# Altium PCB Do_An_2_MCU.PcbDoc
Units mm, origin at the board's own origin, x right, y up, seen from the top; angles counter-clockwise.
Board outline 55.37 x 82.04 mm, 2 copper layers (Top Layer, Bottom Layer); 76 components, 53 nets, 288 pads, 86 vias.
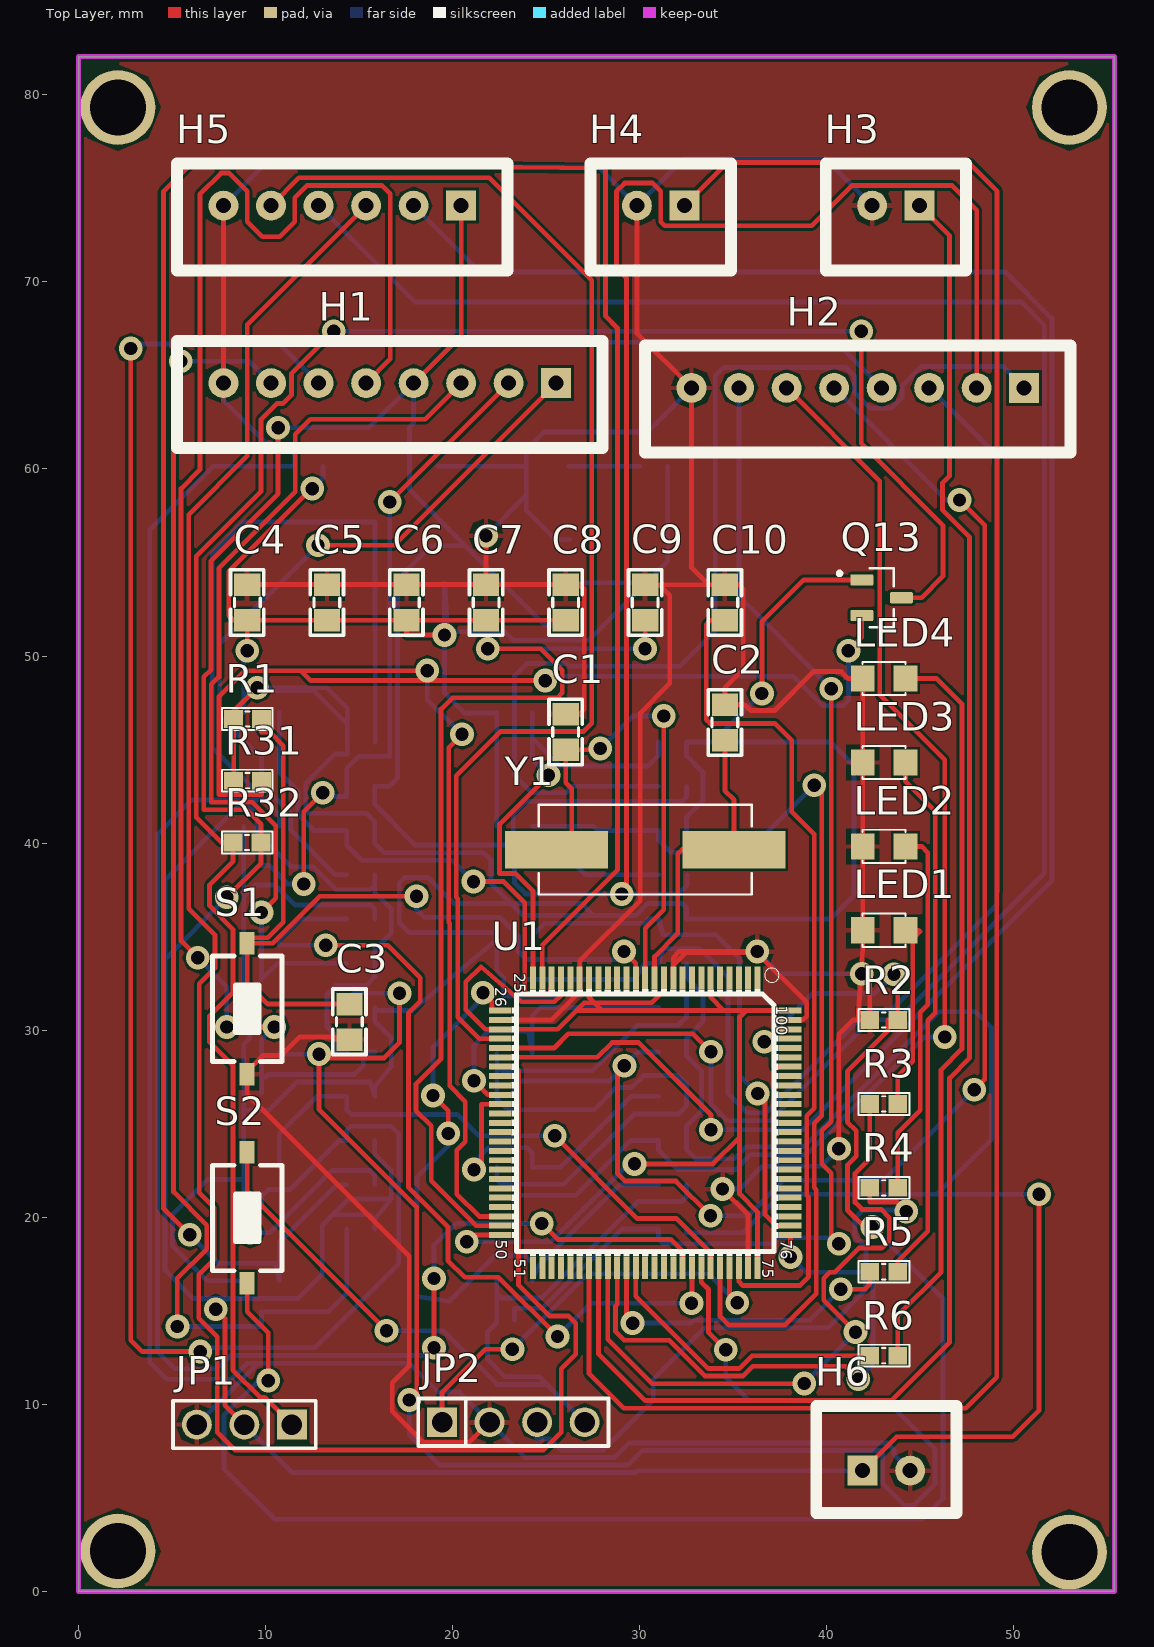
[diagram p0: Top Layer view]
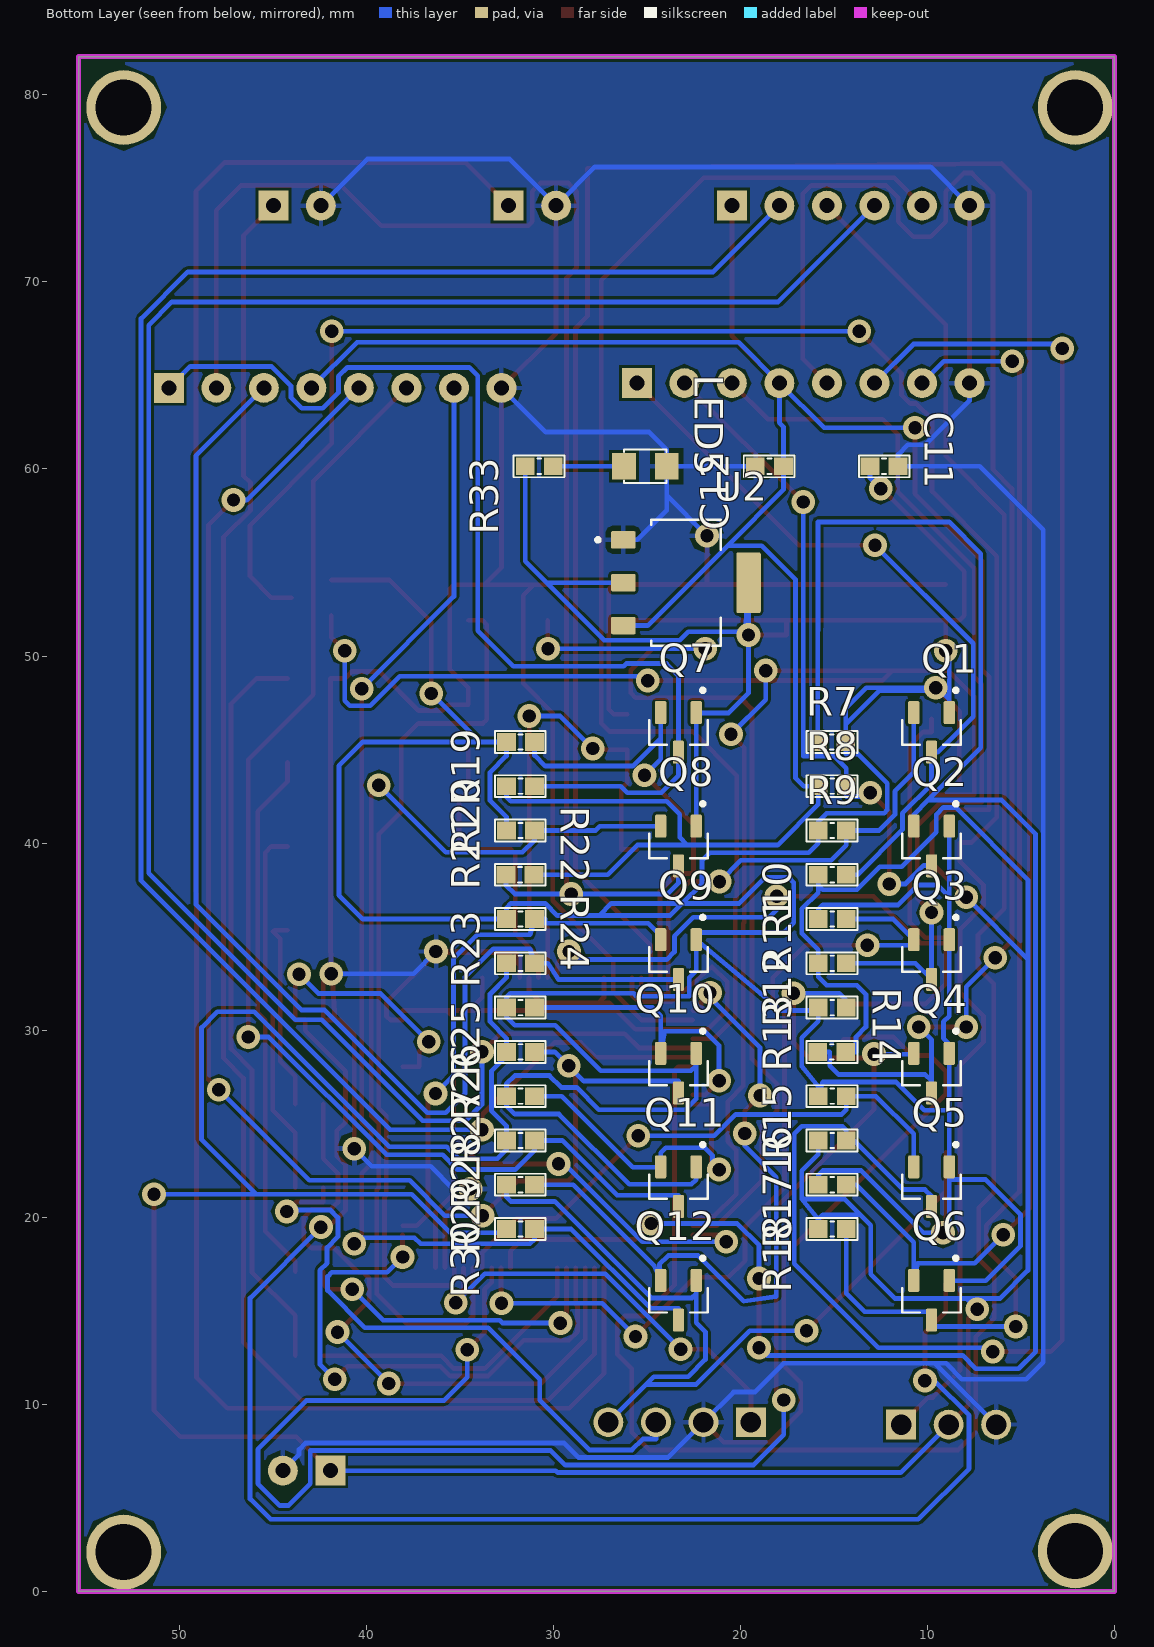
[diagram p1: Bottom Layer view, seen from below]
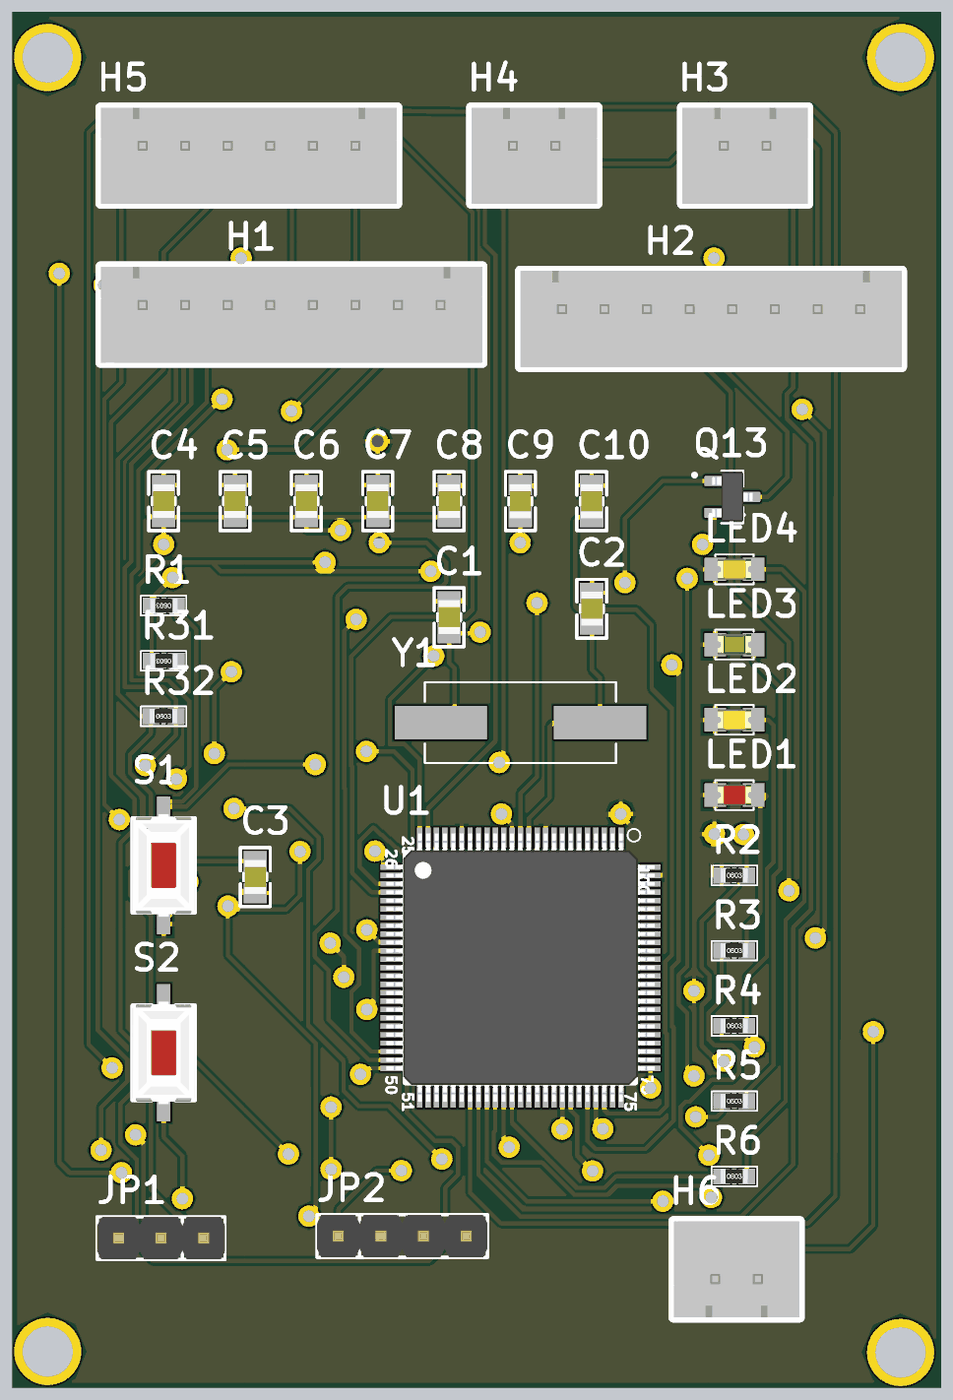
[diagram p2: 3D render of the assembled board from above, using the file's embedded part models]
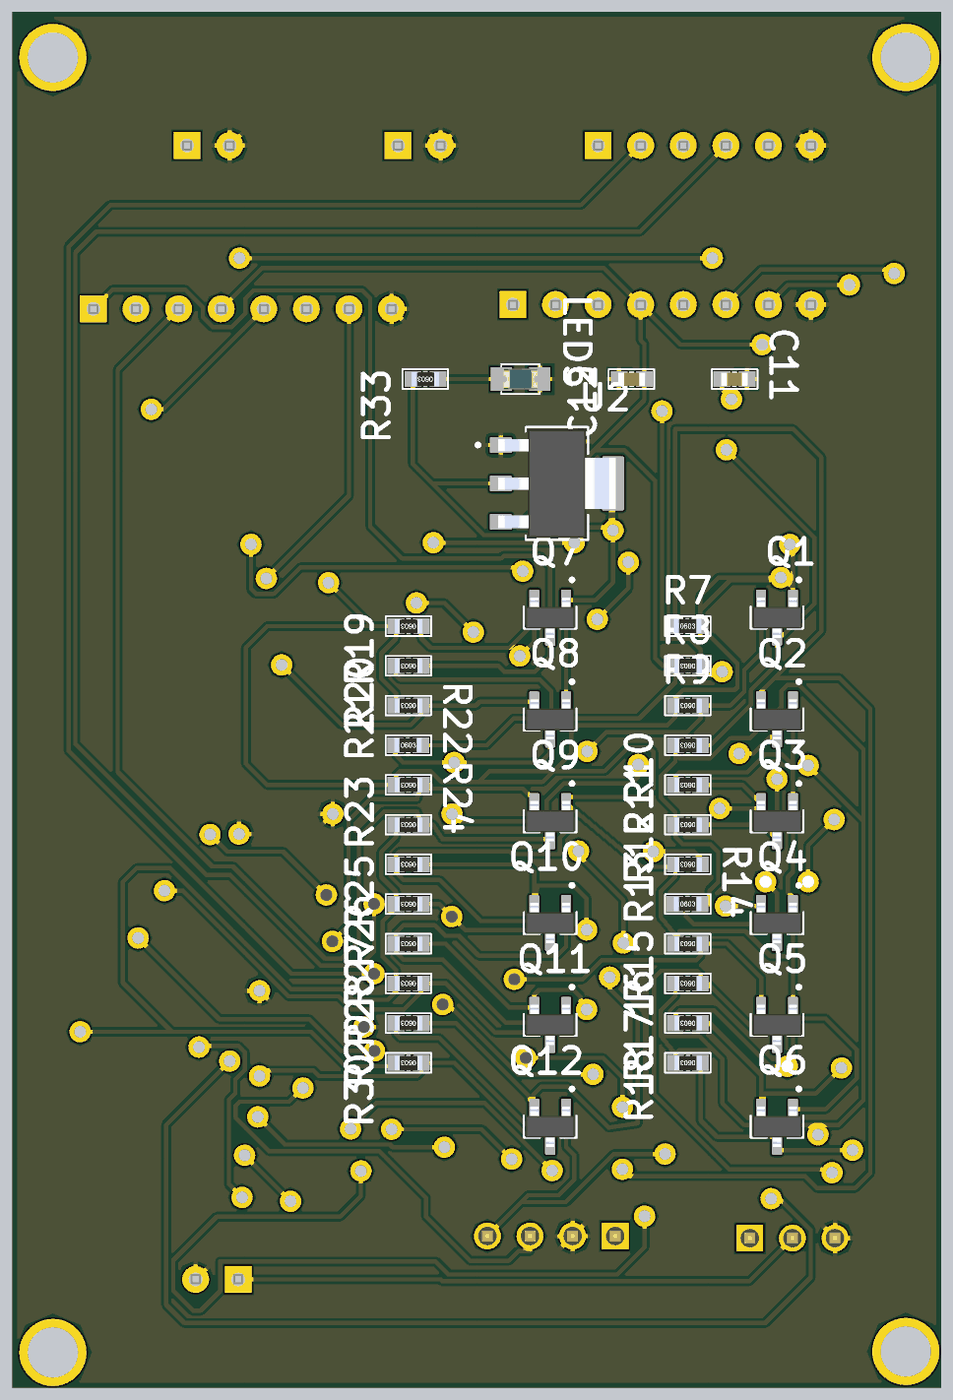
[diagram p3: 3D render of the assembled board from below, using the file's embedded part models]

## Layer stack, top to bottom
Top Solder: solder mask 0.0102, Solder Resist, Dk 3.5
Top Layer: signal copper 0.0356
Dielectric 1: dielectric 0.32, FR-4, Dk 4.8
Bottom Layer: signal copper 0.0356
Bottom Solder: solder mask 0.0102, Solder Resist, Dk 3.5

## Board outline
0,0 55.372,0 55.372,82.042 0,82.042

## Design rules (kind name [scope] priority, off if disabled: settings)
Clearance [All] p1: gap=0.15 ignorepadtopadclearanceinfootprint=FALSE
PolygonConnect [All] p1: connectstyle=Relief reliefconductorwidth=0.254 reliefentries=4 polygonreliefangle="90 Angle" airgapwidth=0.254
RoutingVias [All] p1: holewidth=0.711 width=1.27 viastyle="Through Hole" minholewidth=0.711 minwidth=1.27 maxholewidth=0.711 maxwidth=1.27
SolderMaskExpansion [All] p1: expansion=0.102 istentingtop=FALSE
Width [All] p1: maxlimit=0.254 minlimit=0.254 preferedwidth=0.254
30 further rules are at their usual default settings.

## Classes and differential pairs
component class MCU_Do_An_2: 16 C1 C2 C3 C4 C5 C6 C7 C8 C9 C10 C11 C12 H1 H2 H3 H4 H5 H6 JP1 JP2 LED1 LED2 LED3 LED4 LED5 Q2 Q3 Q4 Q5 Q6 Q7 Q8 Q10 Q11 Q12 Q13 R1 R2 R3 R4 R5 R6 R7 R8 R9 R10 R11 R12 R13 R14 R15 R17 R18 R19 R20 R21 R22 R26 R27 R28 R29 R30 R31 R32 R33 S1 S2 U1 U2 Y1

## Components (designator, comment, footprint, x,y, rotation, side; value= is the part's Value field where it differs from the comment)
16 "10k" "tro smd 0603" 15.088,24.107 r0 bottom
C1 "20pF" "tu 0805" 26.035,45.938 r90 top
C2 "20pF" "tu 0805" 34.544,46.446 r90 top
C3 "20pF" "tu 0805" 14.481,30.453 r270 top
C4 "0.1uF" "tu 0805" 9.017,52.861 r90 top
C5 "0.1uF" "tu 0805" 13.271,52.861 r90 top
C6 "0.1uF" "tu 0805" 17.526,52.861 r90 top
C7 "0.1uF" "tu 0805" 21.78,52.861 r90 top
C8 "0.1uF" "tu 0805" 26.035,52.861 r90 top
C9 "2.2uF" "tu 0805" 30.29,52.861 r270 top
C10 "2.2uF" "tu 0805" 34.544,52.861 r270 top
C11 "106" "tu 0603" 12.319,60.141 r180 bottom
C12 "106" "tu 0603" 18.444,60.141 r0 bottom
H1 "Header 8P 2.54 Duc Thang" XH2.54M-8 25.531,64.586 r180 top
H2 "Header 8P 2.54 Duc" XH2.54M-8 50.546,64.332 r180 top
H3 "Header 2P 2.54 Duc" XH2.54M-2 44.958,74.07 r180 top
H4 "Header 2P 2.54 Duc" XH2.54M-2 32.385,74.07 r180 top
H5 "Header 6P 2.54 Duc Thang" XH2.54M-6 20.451,74.07 r180 top
H6 "Header 2P 2.54 Duc" XH2.54M-2 41.91,6.457 r0 top
JP1 "JP 1x3 2.54" "JP 1x3 DT" 11.405,8.919 r180 top
JP2 "JP 1x4 2.54" "JP 1x4 DT" 19.431,9.046 r0 top
LED1 "LED 0805" LED-0805-Red 44.196,35.338 r180 top
LED2 "LED 0805" LED-0805-Yellow 44.196,39.825 r180 top
LED3 "LED 0805" LED-0805-Green 44.196,44.311 r180 top
LED4 "LED 0805" LED-0805-Orange 44.196,48.797 r180 top
LED5 "LED 0805" LED-0805-Blue 26.221,60.141 r180 bottom
Q1 "BSS138" SOT95P240X111-3N 9.779,45.917 r270 bottom
Q2 "BSS138" SOT95P240X111-3N 9.779,39.846 r270 bottom
Q3 "BSS138" SOT95P240X111-3N 9.779,33.775 r270 bottom
Q4 "BSS138" SOT95P240X111-3N 9.779,27.705 r270 bottom
Q5 "BSS138" SOT95P240X111-3N 9.779,21.634 r270 bottom
Q6 "BSS138" SOT95P240X111-3N 9.779,15.564 r270 bottom
Q7 "BSS138" SOT95P240X111-3N 23.307,45.917 r270 bottom
Q8 "BSS138" SOT95P240X111-3N 23.307,39.846 r270 bottom
Q9 "BSS138" SOT95P240X111-3N 23.307,33.775 r270 bottom
Q10 "BSS138" SOT95P240X111-3N 23.307,27.705 r270 bottom
Q11 "BSS138" SOT95P240X111-3N 23.307,21.634 r270 bottom
Q12 "BSS138" SOT95P240X111-3N 23.307,15.564 r270 bottom
Q13 "BSS138" SOT95P240X111-3N 42.926,53.115 r0 top
R1 "10k" "tro smd 0603" 9.03,46.638 r180 top
R2 "10k" "tro smd 0603" 43.04,30.547 r0 top
R3 "680R" "tro smd 0603" 43.04,26.061 r0 top
R4 "680R" "tro smd 0603" 43.04,21.575 r0 top
R5 "680R" "tro smd 0603" 43.04,17.089 r0 top
R6 "680R" "tro smd 0603" 43.04,12.602 r0 top
R7 "10k" "tro smd 0603" 15.113,45.409 r180 bottom
R8 "10k" "tro smd 0603" 15.088,43.042 r0 bottom
R9 "10k" "tro smd 0603" 15.088,40.675 r0 bottom
R10 "10k" "tro smd 0603" 15.088,38.308 r0 bottom
R11 "10k" "tro smd 0603" 15.088,35.941 r0 bottom
R12 "10k" "tro smd 0603" 15.088,33.575 r0 bottom
R13 "10k" "tro smd 0603" 15.088,31.208 r0 bottom
R14 "10k" "tro smd 0603" 15.113,28.841 r180 bottom
R15 "10k" "tro smd 0603" 15.088,26.474 r0 bottom
R17 "10k" "tro smd 0603" 15.088,21.74 r0 bottom
R18 "10k" "tro smd 0603" 15.088,19.374 r0 bottom
R19 "10k" "tro smd 0603" 31.75,45.409 r0 bottom
R20 "10k" "tro smd 0603" 31.75,43.042 r0 bottom
R21 "10k" "tro smd 0603" 31.75,40.675 r0 bottom
R22 "10k" "tro smd 0603" 31.775,38.308 r180 bottom
R23 "10k" "tro smd 0603" 31.75,35.941 r0 bottom
R24 "10k" "tro smd 0603" 31.75,33.575 r0 bottom
R25 "10k" "tro smd 0603" 31.75,31.208 r0 bottom
R26 "10k" "tro smd 0603" 31.75,28.841 r0 bottom
R27 "10k" "tro smd 0603" 31.75,26.474 r0 bottom
R28 "10k" "tro smd 0603" 31.75,24.107 r0 bottom
R29 "10k" "tro smd 0603" 31.75,21.74 r0 bottom
R30 "10k" "tro smd 0603" 31.75,19.374 r0 bottom
R31 "10k" "tro smd 0603" 9.03,43.336 r180 top
R32 "10k" "tro smd 0603" 9.004,40.034 r0 top
R33 "1k" "tro smd 0603" 30.746,60.141 r0 bottom
S1 "SW-SMD" SW-SMD 9.017,31.144 r90 top
S2 "SW-SMD" SW-SMD 9.017,19.968 r90 top
U1 "MCU-STM32F407VET6(LQFP100)" LQFP100-0.5-13.8X13.8MM 30.29,25.048 r270 top
U2 "AMS1117" SOT229P700X180-4N 22.906,53.918 r180 bottom
Y1 "ECS-80-S-5P-TR" XTAL_ECS-80-S-5P-TR 30.29,39.653 r0 top

## Footprints (in the part's own frame and the unit in brackets; to place one, negate y for a bottom-side part, rotate by r counter-clockwise, add the part's x,y. Pads: shape width x height; smd on the part's side, far side on the other; paste and mask are expansions set on the pad)
"JP 1x3 DT" [mm]
  rect 1.6x1.6 hole 1.1: 1(0,0)
  round 1.6 hole 1.1: 2(2.54,0) 3(5.08,0)
  silkscreen extent -1.27,-1.27 6.35,1.27, body extent -1.27,-1.27 6.35,1.27, height 8.54
"JP 1x4 DT" [mm] "4 pins, 1 row, straight, gold plating"
  rect 1.6x1.6 hole 1.1: 1(0,0)
  round 1.6 hole 1.1: 2(2.54,0) 3(5.08,0) 4(7.62,0)
  silkscreen extent -1.27,-1.27 8.89,1.27, body extent -1.27,-1.27 8.89,1.27, height 8.54
LED-0805-Blue [mil]
  rect 50x55 smd: 1(0,0) 2(90,0)
  silkscreen extent 0,-35 90,35, body extent 5,-25 85,25, height 43
LED-0805-Green [mil]
  rect 50x55 smd: 1(0,0) 2(90,0)
  silkscreen extent 0,-35 90,35, body extent 5,-25 85,25, height 43
LED-0805-Orange [mil]
  rect 50x55 smd: 1(0,0) 2(90,0)
  silkscreen extent 0,-35 90,35, body extent 5,-25 85,25, height 43
LED-0805-Red [mil]
  rect 50x55 smd: 1(0,0) 2(90,0)
  silkscreen extent 0,-35 90,35, body extent 5,-25 85,25, height 43
LED-0805-Yellow [mil]
  rect 50x55 smd: 1(0,0) 2(90,0)
  silkscreen extent 0,-35 90,35, body extent 5,-25 85,25, height 43
LQFP100-0.5-13.8X13.8MM [mm]
  rect 1.2x0.32 smd: 1(-7.75,6) 2(-7.75,5.5) 3(-7.75,5) 4(-7.75,4.5) 5(-7.75,4) 6(-7.75,3.5) 7(-7.75,3) 8(-7.75,2.5) 9(-7.75,2) 10(-7.75,1.5) 11(-7.75,1) 12(-7.75,0.5) 13(-7.75,0) 14(-7.75,-0.5) 15(-7.75,-1) 16(-7.75,-1.5) 17(-7.75,-2) 18(-7.75,-2.5) 19(-7.75,-3) 20(-7.75,-3.5) 21(-7.75,-4) 22(-7.75,-4.5) 23(-7.75,-5) 24(-7.75,-5.5) 25(-7.75,-6) 51(7.75,-6) 52(7.75,-5.5) 53(7.75,-5) 54(7.75,-4.5) 55(7.75,-4) 56(7.75,-3.5) 57(7.75,-3) 58(7.75,-2.5) 59(7.75,-2) 60(7.75,-1.5) 61(7.75,-1) 62(7.75,-0.5) 63(7.75,0) 64(7.75,0.5) 65(7.75,1) 66(7.75,1.5) 67(7.75,2) 68(7.75,2.5) 69(7.75,3) 70(7.75,3.5) 71(7.75,4) 72(7.75,4.5) 73(7.75,5) 74(7.75,5.5) 75(7.75,6)
  rect 0.32x1.2 smd: 26(-6,-7.75) 27(-5.5,-7.75) 28(-5,-7.75) 29(-4.5,-7.75) 30(-4,-7.75) 31(-3.5,-7.75) 32(-3,-7.75) 33(-2.5,-7.75) 34(-2,-7.75) 35(-1.5,-7.75) 36(-1,-7.75) 37(-0.5,-7.75) 38(0,-7.75) 39(0.5,-7.75) 40(1,-7.75) 41(1.5,-7.75) 42(2,-7.75) 43(2.5,-7.75) 44(3,-7.75) 45(3.5,-7.75) 46(4,-7.75) 47(4.5,-7.75) 48(5,-7.75) 49(5.5,-7.75) 50(6,-7.75) 76(6,7.75) 77(5.5,7.75) 78(5,7.75) 79(4.5,7.75) 80(4,7.75) 81(3.5,7.75) 82(3,7.75) 83(2.5,7.75) 84(2,7.75) 85(1.5,7.75) 86(1,7.75) 87(0.5,7.75) 88(0,7.75) 89(-0.5,7.75) 90(-1,7.75) 91(-1.5,7.75) 92(-2,7.75) 93(-2.5,7.75) 94(-3,7.75) 95(-3.5,7.75) 96(-4,7.75) 97(-4.5,7.75) 98(-5,7.75) 99(-5.5,7.75) 100(-6,7.75)
  silkscreen extent -8.27,-7.13 7.11,7.15, body extent -8,-8 8,8, height 1.6
SOT95P240X111-3N [mm]
  rrect25% 1.23x0.6 smd: 1(-1.06,0.95) 2(-1.06,-0.95) 3(1.06,0)
  silkscreen extent -2.35,-1.57 0.65,1.57, body extent -1.2,-1.46 1.2,1.46, height 1.2
SOT229P700X180-4N [mm]
  rrect15% 1.31x0.93 smd: 1(-3.345,2.29) 2(-3.345,0) 3(-3.345,-2.29)
  rrect15% 1.31x3.24 smd: 4(3.345,0)
  silkscreen extent -4.8,-3.36 1.86,3.36, body extent -3.5,-3.25 3.5,3.25, height 1.8
SW-SMD [mm] "Switch SMD type"
  rect 1.2x0.8 smd: 1(-3.5,0) 2(3.5,0)
  silkscreen extent -2.82,-1.85 2.82,1.85, body extent -3.05,-1.85 3.05,1.85, height 2.5
"tro smd 0603" [mm] "Chip Capacitor, 2-Leads, Body 1,60x0,80mm, IPC Medium Density"
  rect 1x0.95 smd mask+0.076: 1(-0.75,0) 2(0.75,0)
  silkscreen extent -1.35,-0.58 1.37,0.58, body extent -0.82,-0.42 0.82,0.43, height 0.44
"tu 0603" [mm] "Chip Capacitor, 2-Leads, Body 1,60x0,80mm, IPC Medium Density"
  rect 1x0.95 smd mask+0.076: 1(-0.75,0) 2(0.75,0)
  silkscreen extent -1.35,-0.58 1.37,0.58, body extent -0.8,-0.4 0.8,0.4, height 0.9
"tu 0805" [mm] "Compoment SMD 80x50mil"
  rect 1.2x1.4 smd: 1(-0.946,-0.003) 2(0.954,-0.003)
  silkscreen extent -1.75,-0.89 1.75,0.89, body extent -1.01,-0.64 1.01,0.63, height 0.61
XH2.54M-2 [mm]
  rect 1.6x1.6 hole 0.8: 1(0,0)
  round 1.6 hole 0.8: 2(2.54,0)
  silkscreen extent -2.48,-2.26 5.02,3.46, body extent -2.48,-2.26 5.02,3.48, height 6.91
XH2.54M-6 [mm]
  rect 1.6x1.6 hole 0.8: 1(0,0)
  round 1.6 hole 0.8: 2(2.54,0) 3(5.08,0) 4(7.62,0) 5(10.16,0) 6(12.7,0)
  silkscreen extent -2.48,-2.26 15.18,3.46, body extent -2.48,-2.26 15.18,3.48, height 6.91
XH2.54M-8 [mm]
  rect 1.6x1.6 hole 0.8: 1(0,0)
  round 1.6 hole 0.8: 2(2.54,0) 3(5.08,0) 4(7.62,0) 5(10.16,0) 6(12.7,0) 7(15.24,0) 8(17.78,0)
  silkscreen extent -2.48,-2.26 20.26,3.46, body extent -2.48,-2.26 20.26,3.48, height 6.91
XTAL_ECS-80-S-5P-TR [mm]
  rect 5.5x2 smd: 1(-4.75,0) 2(4.75,0)
  silkscreen extent -5.7,-2.4 5.7,2.4

## Part data
16 R1 R2 R7 R8 R9 R10 R11 R12 R13 R14 R15 R17 R18 R19 R20 R21 R22 R23 R24 R25 R26 R27 R28 R29 R30 R31 R32: library part "Tro 0603 1% 10k", "Dán", Chung_Loai=Dán, Don_Vi=Con, Ma_Hang=MH006333, So_Chan=2, Ten_Linh_Kien="Trở 0603 1% 10k"
C1 C2 C3 C4 C5 C6 C7 C8: library part "Tu 0805 20pF 50V 10%", "Dán", Chung_Loai=Dán, Don_Vi=Con, Ma_Hang=MH004558, So_Chan=2, Ten_Linh_Kien="Tụ 0805 20P 10% 50V"
C9 C10: library part "Tu 0805 225 25V 10%", "Dán", Chung_Loai=Dán, Don_Vi=Con, Ma_Hang=MH007483, So_Chan=2, Ten_Linh_Kien="Tụ 0805 225-2.2uF 25V 10%"
C11 C12: library part "Tu 0603 106 16V 20%", "Dán", Chung_Loai=Dán, Don_Vi=Con, Ma_Hang=MH004848, So_Chan=2, Ten_Linh_Kien="Tụ 0603-10uF 20% 16V"
H1 H5: "Cắm", Chung_Loai=Cắm, Don_Vi=Con
  H1: Ma_Hang=MH003366, Ten_Linh_Kien="Header 8P XH2.54-8P Đực Thẳng"
  H5: Ma_Hang=MH001972, Ten_Linh_Kien="Header 6P XH2.54-6P Đực Thẳng"
H2: library part "Header 8P 2.54 Duc Thang", "Cắm", Chung_Loai=Cắm, Don_Vi=Con, Ma_Hang=MH003366, Ten_Linh_Kien="Header 8P XH2.54-8P Đực Thẳng"
H3 H4 H6: library part "Header 2P 2.54 Duc Thang", "Cắm", Chung_Loai=Cắm, Don_Vi=Con, Ma_Hang=MH001283, Ten_Linh_Kien="Header 2P XH2.54-2P Đực Thẳng"
JP1: library part "JP 1x3 2.54 Duc Thang", "Cắm", Chung_Loai=Cắm, Don_Vi=Con, Ma_Hang=MH000903, Ten_Linh_Kien="Jump Đơn Đực 2.54MM 1x40P Thẳng 11MM"
JP2: library part "JP 1x4 2.54 Duc Thang", "Cắm", Chung_Loai=Cắm, Don_Vi=Con, Ma_Hang=MH000903, Ten_Linh_Kien="Jump Đơn Đực 2.54MM 1x40P Thẳng 11MM"
LED1: library part "LED 0805 Do", "Dán", Chung_Loai=Dán, Don_Vi=Con, Ma_Hang=MH000897, Ten_Linh_Kien="LED 0805 Màu Đỏ (Red)"
LED2: library part "LED 0805 Vang", "Dán", Chung_Loai=Dán, Don_Vi=Con, Ma_Hang=MH002329, Ten_Linh_Kien="LED 0805 Màu Vàng ( Yellow)"
LED3: library part "LED 0805 Xanh La", "Dán", Chung_Loai=Dán, Don_Vi=Con, Ma_Hang=MH002326, Ten_Linh_Kien="LED 0805 Màu Xanh Lá (Green)"
LED4: library part "LED 0805 Cam", "Dán", Chung_Loai=Dán, Don_Vi=Con, Ma_Hang=MH002328, Ten_Linh_Kien="LED 0805 Màu Cam ( Orange)"
LED5: library part "LED 0805 Xanh Duong", "Dán", Chung_Loai=Dán, Don_Vi=Con, Ma_Hang=MH002327, Ten_Linh_Kien="LED 0805 Màu Xanh Dương (Blue)"
Q1 Q2 Q3 Q4 Q5 Q6 Q7 Q8 Q9 Q10 Q11 Q12 Q13: "N-Channel 50 V 220mA (Ta) 350mW (Ta) Surface Mount SOT-23-3", Package="SOT-23-3 Motorola", Check_prices=https://www.snapeda.com/parts/BSS138/Onsemi/view-part/?ref=eda, MF=onsemi, MP=BSS138, SnapEDA_Link=https://www.snapeda.com/parts/BSS138/Onsemi/view-part/?ref=snap
R3 R4 R5 R6: library part "Tro 0603 1% 680R", "Dán", Chung_Loai=Dán, Don_Vi=Con, Ma_Hang=MH006336, So_Chan=2, Ten_Linh_Kien="Trở 0603 1% 680R"
R33: library part "Tro 0603 1% 1k", "Dán", Chung_Loai=Dán, Don_Vi=Con, Ma_Hang=MH006334, So_Chan=2, Ten_Linh_Kien="Trở 0603 1% 1k"
S1 S2: "Switch", LatestRevisionDate=17-Jul-2002, LatestRevisionNote="Re-released for DXP Platform.", PackageReference=SPST-2, Published=24-Mar-1999, Publisher="Altium Limited"
U1: "ARMÂ® CortexÂ®-M4 STM32F4 Microcontroller IC 32-Bit Single-Core 168MHz 512KB (512K x 8) FLASH 100-LQFP (14x14)", Package="LQFP-100 STMicroelectronics", Availability="In Stock", Check_prices=https://www.snapeda.com/parts/STM32F407VET6/STMicroelectronics/view-part/?ref=eda, MF=STMicroelectronics, MP=STM32F407VET6, Price=None, Purchase-URL=https://pricing.snapeda.com/search/part/STM32F407VET6/?ref=eda, SnapEDA_Link=https://www.snapeda.com/parts/STM32F407VET6/STMicroelectronics/view-part/?ref=snap
U2: "1A LOW DROPOUT VOLTAGE REGULATOR SOT-223", Package="SOT-223 Seeed Technology", Availability="Not in stock", Check_prices=https://www.snapeda.com/parts/AMS1117/Advanced+Monolithic+Systems/view-part/?ref=eda, MF="Advanced Monolithic Systems", MP=AMS1117, Price=None, SnapEDA_Link=https://www.snapeda.com/parts/AMS1117/Advanced+Monolithic+Systems/view-part/?ref=snap
Y1: "CRYSTAL SMD", Package=None, Availability=Unavailable, MP=ECS-80-S-5P-TR, Price=None

## Free pads (board coordinates)
  round 4 hole 3: q(2.102,2.159) q(2.102,79.318) q(52.959,2.102) q(52.959,79.318)

## Via types
v1: diameter 1.27, hole 0.711, Top Layer to Bottom Layer, 86 vias

## Nets (pads, with @x,y where several pads share a name; then routed paths per layer and width w, separated by ;. In a path a pad name is that pad's centre, name@x,y a point inside that pad or via, vN(x,y) a via of type N, cw(c..) or ccw(c..) an arc to the next point about the centre after c; other vN are vias at no path point)
BOOT0: R2.2 S2.1 U1.94 | length 94.8
  Top Layer w0.254: S2.1 9.017,14.954 10.135,13.836 v1(10.135,11.271) ; v1(36.652,29.381) 37.16,28.873 37.16,28.048 U1.94 ; v1(42.418,19.475) 42.012,19.475 41.097,20.39 41.097,22.789 41.566,23.258 41.566,24.613 41.097,25.082 41.097,27.806 43.256,29.965 43.256,30.547 R2.2 43.79,32.784 v1(43.586,32.988)
  Bottom Layer w0.254: v1(10.135,11.271) 9.627,11.271 7.772,9.417 7.772,6.572 10.49,3.854 45.11,3.854 46.203,4.946 46.203,15.685 42.418,19.47 v1(42.418,19.475) ; v1(36.652,29.381) 39.237,31.966 42.564,31.966 v1(43.586,32.988)
ESC1: H3.1 U1.58 | length 88.3
  Top Layer w0.254: U1.58 27.789,12.699 30.288,10.201 43.446,10.201 46.558,13.313 46.558,27.439 47.62,28.501 47.62,56.363 46.18,57.804 46.18,59.249 46.558,59.628 46.558,72.47 H3.1
ESC2: H4.1 U1.57 | length 110.6
  Top Layer w0.254: U1.57 27.29,11.646 29.139,9.797 47.421,9.797 49.073,11.449 49.098,63.265 49.098,74.847 47.574,76.371 34.686,76.371 H4.1
GND: C1.2 C2.2 C3.2 C4.2 C5.2 C6.2 C7.2 C8.2 C9.1 C10.1 C11.2 C12.2 H1.8 H2.8 H3.2 H4.2 H5.6 H6.2 JP1.3 JP2.2 LED1.2 LED2.2 LED3.2 LED4.2 LED5.2 R2.1 S1.1 U1.10 U1.20 U1.27 U1.74 U1.99 U2.1 | length 379.1
  Top Layer w0.254: H1.8 H5.6 ; C4.2 C5.2 C6.2 C7.2 ; C3.2 13.815,29.498 13.672,29.642 11.826,29.642 10.835,28.65 9.865,28.65 9.017,27.802 S1.1 9.017,26.587 17.676,17.928 17.676,12.056 16.764,11.144 16.764,9.62 18.415,7.969 20.894,7.969 JP2.2 ; v1(21.784,56.432) C7.2 ; U1.27 25.289,30.548 26.789,32.049 U1.20 26.789,33.699 30.02,36.93 30.02,46.953 31.605,48.537 31.605,53.241 31.039,53.807 ; C1.2 26.772,46.892 27.026,47.146 27.026,53.562 26.772,53.816 C8.2 C7.2 ; H4.2 29.845,67.253 H2.8 32.766,54.721 33.68,53.807 ; C9.1 31.039,53.807 ; U1.10 31.79,33.485 ; v1(34.417,21.507) 35.79,20.135 U1.74 ; v1(36.271,34.207) 32.12,34.207 31.79,33.877 31.79,33.485 ; U1.99 38.712,30.548 38.917,30.753 38.917,31.489 36.257,34.148 32.453,34.148 31.79,33.485 ; v1(40.64,23.666) 40.64,29.785 41.402,30.547 R2.1 ; v1(41.859,33.013) 42.29,32.582 R2.1 ; 31.039,53.807 33.68,53.807 ; 33.68,53.807 C10.1 35.306,53.807 35.535,53.578 35.535,49.295 34.547,48.308 C2.2 35.613,47.4 35.926,47.087 37.203,47.087 39.281,49.165 40.778,49.165 41.146,48.797 LED4.2 LED3.2 LED2.2 LED1.2 41.91,34.337 41.823,33.016 41.663,30.589 R2.1
  Bottom Layer w0.254: JP1.3 9.601,12.196 ; H1.8 7.751,63.645 10.109,61.286 11.05,61.286 11.569,60.767 C11.2 7.214,60.141 3.81,56.737 3.81,12.262 4.724,11.347 8.157,11.347 9.005,12.196 9.601,12.196 ; H5.6 9.823,76.143 27.773,76.143 H4.2 32.342,76.567 39.921,76.567 H3.2 ; C12.2 LED5.2 ; v1(21.784,56.432) 23.935,58.583 ; U2.1 25.506,56.208 23.935,57.778 23.935,58.583 ; H2.8 30.404,61.969 24.875,61.969 23.935,61.03 LED5.2 ; v1(34.417,21.507) 35.331,21.507 36.551,22.726 39.7,22.726 v1(40.64,23.666) ; v1(36.271,34.207) 37.465,33.013 v1(41.859,33.013) ; H6.2 43.584,7.323 43.584,7.588 43.234,7.938 29.428,7.938 28.651,7.161 23.856,7.161 JP2.2 20.358,10.659 19.217,10.659 17.681,12.196 9.601,12.196 ; 23.935,58.583 LED5.2
LED1: R3.1 U1.59 | length 36.1
  Top Layer w0.254: U1.59 28.29,13.481 30.664,11.107 38.774,11.107 v1(38.786,11.119) ; v1(41.529,13.862) 39.83,15.561 39.83,16.732 40.157,17.06 40.409,17.06 41.704,18.355 42.921,18.355 43.33,18.764 43.33,19.983 42.896,20.417 41.882,20.417 41.504,20.796 41.504,22.345 42.29,23.132 R3.1
  Bottom Layer w0.254: v1(38.786,11.119) v1(41.529,13.862)
LED2: R4.1 U1.60 | length 33.1
  Top Layer w0.254: U1.60 28.789,15.346 28.702,15.259 28.702,13.887 29.157,13.432 31.565,13.432 33.487,11.511 35.509,11.511 36.032,12.033 40.996,12.033 v1(41.681,11.347) ; R4.1 42.29,20.821 43.739,20.821 v1(44.247,20.313)
  Bottom Layer w0.254: v1(41.681,11.347) 42.469,12.135 42.469,17.164 42.088,17.545 42.088,18.383 41.504,18.967 41.504,19.983 41.91,20.39 44.171,20.39 v1(44.247,20.313)
LED3: R5.1 U1.61 | length 17.3
  Top Layer w0.254: U1.61 29.29,14.671 v1(29.616,14.344) ; v1(40.742,16.148) 42.012,16.148 42.29,16.426 R5.1
  Bottom Layer w0.254: v1(29.616,14.344) 32.71,14.344 32.868,14.502 39.095,14.502 v1(40.742,16.148)
LED4: R6.1 U1.62 | length 15.9
  Top Layer w0.254: U1.62 29.79,15.791 33.665,11.915 35.31,11.915 35.998,12.602 R6.1
MISO: H5.2 U1.31 | length 104.4
  Top Layer w0.254: U1.31 27.724,28.548 28.516,29.34 29.935,29.34 33.807,25.467 v1(33.807,24.682)
  Bottom Layer w0.254: H5.2 21.452,70.529 49.532,70.529 52.027,68.035 52.027,37.989 38.721,24.682 v1(33.807,24.682)
MOSI: H5.3 U1.32 | length 113.3
  Top Layer w0.254: H5.3 9.017,67.717 9.017,60.692 5.887,57.562 5.887,36.501 7.29,35.098 7.29,33.318 6.451,32.479 6.451,21.312 7.26,20.504 7.26,17.753 6.429,16.922 6.429,14.598 7.417,13.61 7.417,8.502 8.354,7.565 24.869,7.565 25.806,8.502 25.806,11.911 26.577,12.682 26.577,14.333 26.19,14.721 25.176,14.721 23.52,16.376 23.52,27.845 23.317,28.048 U1.32
MOTOR1: Q1.2 R9.1 U1.23 | length 27.6
  Top Layer w0.254: v1(21.107,37.941) 22.733,37.941 23.851,36.823 23.851,31.921 25.229,31.921 25.229,32.242 25.29,32.303 U1.23
  Bottom Layer w0.254: Q1.2 10.729,43.78 11.737,42.773 11.737,41.522 12.584,40.675 R9.1 14.338,39.897 15.15,39.084 19.964,39.084 v1(21.107,37.941)
MOTOR1_A: Q2.2 R7.1 U1.67 | length 107.7
  Top Layer w0.254: v1(18.999,13.024) v1(18.999,16.732) ; v1(24.765,19.665) 25.615,18.815 31.654,18.815 32.289,18.18 U1.67
  Bottom Layer w0.254: Q2.2 10.729,41.522 9.942,42.31 ; R7.1 15.85,57.169 8.839,57.169 7.142,55.472 7.142,45.109 9.942,42.31 ; v1(18.999,13.024) 18.593,12.617 8.123,12.617 7.414,11.908 5.131,11.908 4.221,12.818 4.221,40.486 6.045,42.31 9.942,42.31 ; v1(18.999,16.732) 18.999,18.503 20.161,19.665 v1(24.765,19.665)
MOTOR1_B: Q3.2 R11.1 U1.68 | length 46.2
  Top Layer w0.254: v1(13.208,34.537) 16.533,34.537 18.268,32.802 18.268,31.536 17.632,30.9 17.632,21.604 19.746,19.491 19.746,17.69 20.642,16.794 22.443,16.794 v1(25.603,13.633) ; v1(32.766,15.411) 32.79,15.435 U1.68
  Bottom Layer w0.254: v1(13.208,34.537) 10.729,34.537 Q3.2 11.835,35.941 R11.1 ; v1(25.603,13.633) 27.381,15.411 v1(32.766,15.411)
MOTOR2: Q6.2 R17.1 U1.24 | length 138.9
  Top Layer w0.254: v1(5.944,19.069) 4.547,20.466 4.547,74.847 6.02,76.32 28.169,76.066 28.169,68.167 28.804,67.532 28.804,38.56 24.789,34.546 U1.24
  Bottom Layer w0.254: v1(5.944,19.069) 7.468,17.545 10.526,17.545 Q6.2 10.729,18.663 13.806,21.74 R17.1
MOTOR2_A: Q4.2 R13.1 U1.69 | length 88.5
  Top Layer w0.254: v1(12.852,28.721) v1@12.852,28.518 ; v1(17.152,31.972) 17.152,29.33 16.339,28.518 v1@12.852,28.518 ; v1(17.678,10.23) 18.08,10.631 18.08,20.545 12.852,25.773 v1@12.852,28.518 ; U1.69 33.289,16.529 33.678,16.14 33.678,13.839 v1(34.595,12.922)
  Bottom Layer w0.254: Q4.2 10.729,28.721 v1(12.852,28.721) v1@12.852,28.518 ; R13.1 14.338,31.591 14.719,31.972 v1(17.152,31.972) ; v1(17.678,10.23) 17.678,8.375 19.297,6.757 29.355,6.757 30.132,7.534 42.987,7.534 42.987,5.759 44.155,4.591 44.614,4.591 45.782,5.759 45.782,7.606 43.188,10.201 35.843,10.201 34.595,11.449 v1(34.595,12.922)
MOTOR2_B: Q5.2 R15.1 U1.70 | length 30.4
  Top Layer w0.254: v1(25.451,24.352) 29.87,19.932 31.974,19.932 33.79,18.117 U1.70
  Bottom Layer w0.254: Q5.2 10.729,24.454 12.749,26.474 R15.1 14.338,25.737 14.578,25.497 20.242,25.497 21.387,24.352 v1(25.451,24.352)
MOTOR3: Q7.2 R19.1 U1.25 | length 25.2
  Top Layer w0.254: U1.25 24.29,37.458 23.375,38.373 22.504,38.373 22.504,41.014 v1(25.121,43.631)
  Bottom Layer w0.254: Q7.2 24.257,45.604 ; v1(25.121,43.631) 24.257,44.494 24.257,45.604 ; R19.1 31,44.689 30.429,44.118 25.744,44.118 24.257,45.604
MOTOR3_A: Q8.2 R21.1 U1.71 | length 53.6
  Top Layer w0.254: U1.71 34.289,14.7 34.749,14.24 37.76,14.24 39.426,15.906 39.426,21.471 39.324,21.572 39.324,25.017 39.725,25.418 39.725,42.692 v1(39.319,43.097)
  Bottom Layer w0.254: Q8.2 27.508,40.906 27.739,40.675 R21.1 31,40.164 31.648,39.516 35.738,39.516 v1(39.319,43.097)
MOTOR3_B: Q9.2 R23.1 U1.77 | length 28.8
  Top Layer w0.254: v1(36.297,26.613) 36.694,26.216 36.694,20.148 37.293,19.548 U1.77
  Bottom Layer w0.254: Q9.2 24.257,35.051 24.928,35.722 30.422,35.722 30.422,35.941 R23.1 31.242,35.096 34.066,35.096 35.334,33.828 35.334,27.575 v1(36.297,26.613)
MOTOR4: Q12.2 R29.1 U1.26 | length 37.3
  Top Layer w0.254: v1(18.948,26.511) 19.761,25.698 v1(19.761,24.479) ; v1(21.615,31.997) 22.098,31.515 22.098,31.048 U1.26
  Bottom Layer w0.254: v1(18.948,26.511) 18.948,29.076 21.615,31.743 v1(21.615,31.997) ; v1(19.761,24.479) 19.761,23.814 18.085,22.137 18.085,15.767 19.812,15.513 22.25,17.951 23.851,17.951 24.32,17.481 Q12.2 24.611,17.418 28.933,21.74 R29.1
MOTOR4_A: Q10.2 R25.1 U1.35 | length 17
  Top Layer w0.254: v1(21.133,27.298) 21.883,26.548 U1.35
  Bottom Layer w0.254: v1(21.133,27.298) 21.133,29.178 21.895,29.94 24.054,29.94 Q10.2 24.257,30.778 24.686,31.208 R25.1
MOTOR4_B: Q11.2 R27.1 U1.36 | length 17.7
  Top Layer w0.254: v1(21.133,22.549) 21.539,22.955 21.539,26.048 U1.36
  Bottom Layer w0.254: v1(21.133,22.549) 21.488,22.904 21.488,23.311 21.895,23.717 23.978,23.717 24.257,23.438 Q11.2 24.257,22.676 25.746,22.676 29.544,26.474 R27.1
Net16_1: 16.1 H1.6 Q5.3 | length 97.4
  Top Layer w0.254: v1(2.794,66.44) 2.794,13.43 3.404,12.82 v1(6.502,12.82)
  Bottom Layer w0.254: v1(2.794,66.44) 3.031,66.677 10.739,66.677 H1.6 ; v1(6.502,12.82) 6.706,13.024 12.624,13.024 17.12,17.519 17.12,24.454 16.713,24.86 14.541,24.86 14.338,24.657 16.1 13.928,24.107 11.303,21.482 10.135,21.482 9.779,21.126 Q5.3
NetH1_1: H1.1 Q1.3 R10.1 | length 39.5
  Top Layer w0.254: v1(12.802,55.924) 16.869,55.924 H1.1
  Bottom Layer w0.254: v1(12.802,55.924) 7.546,50.669 7.546,46.752 9.442,44.857 Q1.3 9.779,43.148 11.333,41.594 11.333,40.71 13.734,38.308 R10.1
NetH1_2: H1.2 Q2.3 R8.1 | length 36.1
  Top Layer w0.254: v1(12.04,37.814) 12.04,41.675 v1(13.056,42.691) ; v1(16.64,58.235) H1.2
  Bottom Layer w0.254: Q2.3 9.779,38.805 10.185,38.805 11.176,37.814 v1(12.04,37.814) ; v1(13.056,42.691) 13.056,42.488 14.338,42.488 R8.1 14.338,43.998 14.986,44.647 16.64,44.647 v1(16.64,58.235)
NetH1_3: H1.3 Q3.3 R12.1 | length 48.9
  Top Layer w0.254: v1(9.779,36.29) 10.541,37.052 10.541,40.936 9.296,42.18 7.099,42.18 7.099,48.478 7.503,48.882 7.503,54.689 11.582,58.769 11.582,61.842 12.395,62.655 18.52,62.655 H1.3
  Bottom Layer w0.254: v1(9.779,36.29) Q3.3 10.638,33.574 R12.1
NetH1_5: H1.5 Q4.3 R14.1 | length 85.2
  Top Layer w0.254: v1(6.375,33.877) 5.483,34.77 5.483,58.949 6.488,59.955 6.488,74.681 7.62,75.812 8.052,75.812 9.017,74.847 9.017,73.222 9.83,72.409 10.744,72.409 11.557,73.222 11.557,74.492 12.217,75.152 16.205,75.152 16.662,74.695 16.662,65.877 H1.5 ; v1(7.925,30.169) v1(10.465,30.169)
  Bottom Layer w0.254: v1(6.375,33.877) 7.925,32.328 v1(7.925,30.169) ; Q4.3 9.779,27.3 ; v1(10.465,30.169) 9.779,29.483 9.779,27.3 ; R14.1 15.215,28.841 15.215,28.111 14.734,27.63 10.109,27.63 9.779,27.3
NetH1_7: H1.7 Q6.3 R18.1 | length 72.1
  Top Layer w0.254: v1(5.283,14.167) 5.283,16.732 6.856,18.304 6.856,19.577 5.079,21.354 5.079,65.372 v1(5.461,65.754)
  Bottom Layer w0.254: v1(5.283,14.167) 9.779,14.167 Q6.3 9.779,14.954 13.36,14.954 14.338,15.931 R18.1 ; v1(5.461,65.754) 9.122,65.754 H1.7
NetH2_1: H2.1 Q7.3 R20.1 | length 58.9
  Bottom Layer w0.254: R20.1 26.385,43.042 26.038,42.695 24.217,42.695 23.307,43.605 Q7.3 23.307,48.957 23.947,49.597 26.09,49.597 26.236,49.452 32.135,49.452 34.036,51.352 34.036,64.967 34.493,65.424 40.996,65.424 41.478,64.941 41.478,64.078 42.316,63.239 43.434,63.239 44.018,63.824 44.018,64.433 45.06,65.475 49.403,65.475 H2.1
NetH2_2: H2.2 Q8.3 R22.1 | length 81.3
  Top Layer w0.254: v1(29.032,37.281) 29.286,37.535 29.286,70.224 28.753,70.758 28.753,74.847 29.185,75.279 30.683,75.279 31.115,74.847 31.115,73.222 31.344,72.993 39.192,72.993 41.351,75.152 46.685,75.152 48.006,73.831 H2.2
  Bottom Layer w0.254: Q8.3 23.307,37.865 23.891,37.281 v1(29.032,37.281) 32.055,37.281 32.525,37.751 R22.1
NetH2_3: H2.3 Q9.3 R24.1 | length 67.9
  Bottom Layer w0.254: Q9.3 29.724,32.715 30.29,33.574 R24.1 31.242,34.36 33.198,34.36 34.719,32.838 34.719,26.604 35.742,25.582 36.724,25.582 42.226,31.083 43.459,31.083 49.098,36.723 49.098,60.699 H2.3
NetH2_5: H2.5 Q10.3 R26.1 | length 79.2
  Top Layer w0.254: v1(29.176,28.096) 28.803,27.723 28.803,22.342 29.21,21.935 31.932,21.935 v1(33.782,20.085) ; v1(47.092,58.337) 48.431,56.998 48.431,27.367 v1(47.879,26.816)
  Bottom Layer w0.254: Q10.3 23.307,27.282 28.362,27.282 v1(29.176,28.096) 29.921,28.841 R26.1 ; v1(33.782,20.085) 35.789,20.085 37.68,21.976 43.039,21.976 v1(47.879,26.816) ; H2.5 46.38,58.337 v1(47.092,58.337)
NetH2_6: H2.6 Q11.3 R28.1 | length 66.9
  Top Layer w0.254: H2.6 42.824,59.353 42.824,47.923 46.304,44.443 v1(46.304,29.635)
  Bottom Layer w0.254: Q11.3 23.307,21.177 26.585,21.177 29.515,24.107 R28.1 31,23.582 32.028,22.553 35.123,22.553 35.906,23.336 38.906,23.336 45.205,29.635 v1(46.304,29.635)
NetH2_7: H2.7 Q12.3 R30.1 | length 69
  Top Layer w0.254: v1(40.234,48.253) 40.234,25.119 39.728,24.613 39.728,22.853 40.234,22.348 40.234,18.993 v1(40.64,18.586)
  Bottom Layer w0.254: Q12.3 23.307,15.132 24.798,15.132 29.04,19.374 R30.1 31,18.828 31.242,18.586 37.094,18.586 37.419,18.912 40.315,18.912 v1(40.64,18.586) ; H2.7 35.306,53.181 v1(40.234,48.253)
NetJP1_1: JP1.1 Q13.3 R32.1 | length 112.2
  Top Layer w0.254: JP1.1 9.952,10.372 9.703,10.372 8.254,11.82 8.254,28.117 7.005,29.367 7.005,30.762 8.254,32.011 8.254,35.396 7.005,36.646 7.005,37.767 8.254,39.016 R32.1 7.629,40.034 6.291,41.372 6.291,55.331 9.754,58.794 9.754,62.655 10.592,63.493 10.922,63.493 11.379,63.951 11.379,65.094 v1(13.64,67.354) ; v1(41.834,67.354) 41.834,61.36 46.203,56.991 46.203,54.258 45.06,53.115 Q13.3
  Bottom Layer w0.254: v1(13.64,67.354) v1(41.834,67.354)
NetLED1_1: LED1.1 R3.2 | length 10.5
  Top Layer w0.254: R3.2 43.79,27.539 44.584,28.333 44.584,34.882 44.971,35.27 44.902,35.338 LED1.1
NetLED2_1: LED2.1 R4.2 | length 19.9
  Top Layer w0.254: R4.2 43.79,24.53 44.988,25.728 44.988,30.956 45.39,31.358 45.39,39.495 45.06,39.825 LED2.1
NetLED3_1: LED3.1 R5.2 | length 28.7
  Top Layer w0.254: R5.2 43.79,17.649 45.392,19.251 45.392,30.527 45.796,30.931 45.796,41.7 44.196,43.3 LED3.1
NetLED4_1: LED4.1 R6.2 | length 39.8
  Top Layer w0.254: R6.2 43.79,14.751 46.101,17.061 46.101,27.885 47.216,29 47.216,47.454 45.872,48.797 LED4.1
NetLED5_1: LED5.1 R33.1 | length 3.8
  Bottom Layer w0.254: LED5.1 R33.1
NetU1_6: U1.6 U1.11 U1.19 U1.22 U1.28 U1.50 U1.75 U1.100 | length 69.9
  Top Layer w0.254: v1(20.752,18.688) 21.112,19.048 U1.50 ; U1.22 25.789,31.879 25.425,31.515 23.673,31.515 21.514,33.394 20.701,32.582 20.701,31.083 21.736,30.048 U1.28 25.603,30.048 26.603,31.048 ; U1.19 27.29,31.75 27.576,31.463 ; v1(29.718,22.853) 33.909,22.853 35.33,24.274 ; U1.11 31.289,32.121 30.632,31.463 27.576,31.463 ; U1.6 33.79,31.752 34.493,31.048 ; U1.75 36.289,20.288 35.33,21.248 35.33,24.274 ; U1.100 35.678,31.048 ; 26.603,31.048 27.991,31.048 ; 26.603,31.048 27.018,31.463 27.576,31.463 ; 27.576,31.463 27.991,31.048 ; 27.991,31.048 34.493,31.048 ; 34.493,31.048 35.678,31.048 ; 35.33,24.274 35.33,30.7 35.678,31.048
  Bottom Layer w0.254: v1(20.752,18.688) 25.248,18.688 29.413,22.853 v1(29.718,22.853)
NRST: C3.1 R1.1 S1.2 U1.14 | length 47.6
  Top Layer w0.254: R1.1 9.78,45.942 10.211,45.942 10.947,45.205 10.947,35.782 10.109,34.944 9.017,34.944 S1.2 ; C3.1 10.109,31.398 9.017,32.491 S1.2 ; v1(18.059,37.159) 12.883,37.159 10.368,34.644 S1.2 ; v1(29.159,34.207) 29.79,33.577 U1.14
  Bottom Layer w0.254: v1(18.059,37.159) 18.059,36.442 18.466,36.036 22.504,36.036 23.52,35.02 23.52,34.182 23.927,33.775 28.727,33.775 v1(29.159,34.207)
OSC_IN: C2.1 U1.12 Y1.2 | length 16.3
  Top Layer w0.254: U1.12 30.79,33.933 32.029,35.172 32.029,39.425 32.258,39.653 Y1.2 35.04,42.31 34.547,42.802 C2.1
OSC_OUT: C1.1 U1.13 Y1.1 | length 26.7
  Top Layer w0.254: Y1.1 26.368,39.653 26.368,42.893 26.038,43.223 C1.1 27.828,44.992 v1(27.889,45.053) ; U1.13 30.29,35.453 31.28,36.444 v1(31.28,46.793)
  Bottom Layer w0.254: v1(27.889,45.053) 29.629,46.793 v1(31.28,46.793)
RX_Sbus_TX: Q13.2 R31.1 U1.48 | length 87.6
  Top Layer w0.254: R31.1 9.78,42.584 7.503,42.584 7.503,47.831 8.89,49.219 11.885,49.219 ; v1(18.644,49.219) 11.885,49.219 ; v1(20.498,45.815) 19.787,45.104 19.787,35.757 19.837,35.706 19.837,27.019 20.676,26.181 20.676,24.047 20.218,23.59 20.218,21.242 21.412,20.048 U1.48 ; v1(24.943,48.685) 12.418,48.685 11.885,49.219 ; v1(41.148,50.285) 41.866,51.003 Q13.2
  Bottom Layer w0.254: v1(18.644,49.219) 18.644,47.669 v1(20.498,45.815) ; v1(24.943,48.685) 25.171,48.914 38.202,48.914 39.776,47.339 40.869,47.339 41.148,47.618 v1(41.148,50.285)
SCK: H5.4 U1.30 | length 109.2
  Top Layer w0.254: U1.30 25.414,29.048 26.179,29.813 32.842,29.813 v1(33.807,28.848)
  Bottom Layer w0.254: H5.4 17.974,68.927 50.381,68.927 51.623,67.684 51.623,38.393 43.794,30.564 42.381,30.564 36.982,25.165 34.671,25.165 33.807,26.028 v1(33.807,28.848)
SS: H5.5 U1.29 | length 67.8
  Top Layer w0.254: H5.5 11.779,75.558 21.946,75.558 27.432,70.072 27.432,46.399 27,45.967 22.555,45.967 20.193,43.605 20.193,37.103 20.269,37.027 20.269,30.702 21.423,29.548 U1.29
SWCLK: JP2.3 U1.76 | length 29.2
  Top Layer w0.254: U1.76 38.049,19.048 v1(38.049,17.875)
  Bottom Layer w0.254: JP2.3 24.511,8.147 25.214,8.147 25.796,7.565 28.067,7.565 30.717,10.215 30.717,11.33 33.484,14.098 40.067,14.098 42.06,16.09 42.06,16.835 41.835,17.06 38.864,17.06 v1(38.049,17.875)
SWDIO: JP2.1 U1.72 | length 22.7
  Top Layer w0.254: JP2.1 19.431,10.636 21.742,12.947 v1(23.19,12.947) ; U1.72 34.79,15.851 v1(35.204,15.437)
  Bottom Layer w0.254: v1(23.19,12.947) 27.229,16.986 33.655,16.986 v1(35.204,15.437)
VCAP_1: C9.2 U1.49 | length 53.2
  Top Layer w0.254: v1(21.869,50.387) 24.714,50.387 25.857,49.244 25.857,48.025 25.603,47.771 19.99,47.771 19.38,47.161 19.38,28.464 18.036,27.121 18.036,25.698 18.847,24.888 18.847,21.964 21.263,19.548 U1.49 ; v1(30.277,50.387) 30.286,50.396 C9.2
  Bottom Layer w0.254: v1(21.869,50.387) v1(30.277,50.387)
VCAP_2: C10.2 U1.73 | length 45.3
  Top Layer w0.254: C10.2 33.778,51.907 33.553,51.682 33.553,46.602 33.757,46.399 37.211,46.399 38.124,45.486 38.124,41.681 39.321,40.484 39.321,25.822 38.92,25.421 38.92,21.168 39.022,21.067 39.022,16.815 38.557,16.351 35.509,16.351 35.289,16.571 U1.73
VCC3V3: C4.1 C5.1 C6.1 C7.1 C8.1 C11.1 JP2.4 Q1.1 Q2.1 Q3.1 Q4.1 Q5.1 Q6.1 Q7.1 Q8.1 Q9.1 Q10.1 Q11.1 Q12.1 Q13.1 R1.2 R7.2 R9.2 R11.2 R13.2 R15.2 R17.2 R19.2 R21.2 R23.2 R25.2 R27.2 R29.2 R31.2 R33.2 S2.2 U2.2 U2.4 | length 365.3
  Top Layer w0.254: R31.2 8.295,43.336 8.295,46.638 R1.2 8.28,47.034 v1(9.55,48.304) ; S2.2 9.017,21.38 ; v1(9.02,50.284) C4.1 ; v1(9.169,19.17) 9.017,19.323 9.017,21.38 ; v1(12.497,58.947) 12.446,58.947 8.026,54.527 8.026,52.162 8.273,51.916 C4.1 ; v1(16.462,13.936) 9.017,21.38 ; v1(19.561,51.124) 17.529,51.124 C6.1 ; C8.1 C7.1 C6.1 ; v1(36.525,47.999) 36.525,51.83 38.76,54.065 Q13.1 ; C4.1 C5.1 C6.1
  Bottom Layer w0.254: Q6.1 8.829,16.605 6.883,16.605 5.029,18.459 5.029,20.161 6.883,22.015 8.829,22.015 ; Q2.1 8.829,38.026 8.837,38.018 8.837,37.123 ; Q1.1 8.829,47.684 ; v1(9.02,50.284) 8.829,50.092 8.829,47.684 ; v1(9.55,48.304) 13.271,48.304 14.363,47.212 14.363,46.362 ; v1(12.497,58.947) 13.069,59.519 C11.1 ; R17.2 15.838,22.256 15.596,22.498 13.538,22.498 10.211,19.17 v1(9.169,19.17) 8.829,19.511 8.829,22.015 ; R13.2 R13.2@15.838,31.058 ; R11.2 15.838,36.454 15.596,36.696 11.552,36.696 10.488,37.761 9.474,37.761 8.837,37.123 ; v1(16.462,13.936) 19.5,13.936 22.368,11.068 25.03,11.068 ; Q12.1 22.357,15.919 ; Q11.1 22.357,22.015 22.611,21.761 25.933,21.761 29.693,25.52 32.055,25.52 32.5,25.966 R27.2 32.5,27.133 32.055,27.578 30.201,27.578 29.566,26.943 28.753,26.943 27.559,25.749 22.936,25.749 22.357,26.328 22.357,28.111 ; Q10.1 22.357,28.111 ; Q8.1 Q7.1@22.357,46.958 ; Q7.1 Q7.1@22.357,46.958 ; U2.2 30.353,53.918 ; JP2.4 25.03,11.068 ; R33.2 31.496,55.061 30.353,53.918 ; R29.2 32.5,21.089 32.258,20.847 29.921,20.847 24.765,15.691 22.586,15.691 22.357,15.919 ; R21.2 32.5,41.395 33.376,42.271 33.376,43.783 32.5,44.659 R19.2 33.934,45.409 ; v1(36.525,47.999) 33.934,45.409 ; 8.829,22.015 Q5.1 8.829,25.724 ; 8.829,25.724 10.16,25.724 11.663,27.226 15.596,27.226 R15.2 15.838,26.984 16.71,28.058 16.71,29.601 15.838,30.473 R13.2@15.838,31.058 ; 8.829,25.724 8.829,27.398 ; 8.829,25.724 8.829,27.398 ; 8.829,27.398 Q4.1 8.829,29.253 9.141,29.565 9.141,30.446 8.829,30.758 Q3.1 8.829,36.194 8.837,36.202 8.837,37.123 ; 8.829,47.684 9.296,48.152 12.573,48.152 14.363,46.362 ; 14.363,46.362 R7.2 14.363,44.76 13.705,44.76 12.141,43.196 12.141,41.774 12.316,41.599 15.392,41.599 15.838,41.153 R9.2 15.838,39.998 16.346,39.49 21.641,39.49 22.047,39.084 22.047,37.839 23.114,36.773 ; R13.2@15.838,31.058 17.831,31.058 Q9.1 ; 22.357,15.919 22.357,14.361 21.865,13.869 21.865,12.402 22.792,11.475 24.623,11.475 25.03,11.068 ; 22.357,28.111 22.636,27.832 27.457,27.832 29.896,30.27 32.055,30.27 32.5,30.715 R25.2 32.5,31.769 32.297,31.972 25.705,31.972 25.552,31.82 22.728,31.82 22.728,32.815 22.357,33.186 Q9.1 ; Q9.1 22.357,35.221 17.679,35.221 17.147,35.752 17.147,37.89 17.424,38.167 18.669,38.167 20.064,36.773 23.114,36.773 ; Q7.1@22.357,46.958 20.628,46.958 19.561,48.025 v1(19.561,51.124) U2.4 19.739,51.301 22.784,51.301 23.241,50.844 27.28,50.844 30.353,53.918 ; 23.114,36.773 23.76,36.126 27.548,36.126 ; 23.114,36.773 26.901,36.773 27.548,36.126 ; 27.548,36.126 29.783,36.126 30.429,36.773 32.258,36.773 32.5,36.531 R23.2 40.183,35.941 41.453,37.211 41.453,44.139 40.183,45.409 33.934,45.409
VCC5V: 16.2 C12.1 H1.4 H2.4 H5.1 H6.1 JP1.2 R8.2 R10.2 R12.2 R14.2 R18.2 R20.2 R22.2 R24.2 R26.2 R28.2 R30.2 R32.2 U2.3 | length 342.8
  Top Layer w0.254: v1(7.341,15.081) 7.823,14.598 7.823,9.961 JP1.2 ; v1(7.925,37.103) 9.754,38.932 R32.2 9.754,41.014 8.992,41.776 6.695,41.776 6.695,48.882 7.087,49.274 7.087,55.086 10.668,58.667 v1(10.668,62.198) ; H1.4 20.451,67.126 H5.1 ; H6.1 43.727,8.274 49.936,8.274 51.333,9.671 v1(51.333,21.228)
  Bottom Layer w0.254: v1(7.341,15.081) 7.925,15.665 ; v1(7.925,37.103) 4.625,33.803 ; JP1.2 11.431,6.353 29.759,6.353 29.863,6.457 H6.1 ; v1(10.668,62.198) 15.523,62.198 H1.4 ; R14.2 13.815,28.841 13.815,29.642 13.284,30.173 13.284,31.921 13.767,32.404 15.392,32.404 15.838,32.849 R12.2 15.838,34.297 16.713,35.172 16.713,36.484 15.838,37.359 15.838,37.751 ; R18.2 15.838,19.894 ; 16.2 15.838,23.361 16.713,22.486 16.713,20.974 ; R10.2 15.838,37.751 ; U2.3 24.947,51.628 20.676,55.899 ; R22.2 27.09,38.308 25.502,39.897 22.835,39.897 ; R30.2 32.5,19.17 35.509,19.17 37.567,21.228 45.872,21.228 ; R24.2 32.5,32.81 33.376,31.935 33.376,30.448 32.5,29.572 R26.2 32.5,28.612 33.299,27.813 33.299,25.698 32.5,24.899 R28.2 32.5,23.615 32.983,23.133 35.052,23.133 35.687,23.768 38.766,23.768 45.98,30.981 47.955,30.981 48.793,30.143 48.793,24.149 45.872,21.228 ; R20.2 32.5,42.476 32.258,42.234 23.927,42.234 23.241,41.548 23.241,40.303 22.835,39.897 ; H2.4 40.488,66.77 20.095,66.77 H1.4 ; v1(51.333,21.228) 45.872,21.228 ; 4.625,33.803 4.625,38.045 8.484,41.903 9.144,41.903 9.525,41.522 9.525,40.583 11.377,38.731 12.548,38.731 13.769,37.509 15.596,37.509 15.838,37.751 ; 4.625,33.803 4.625,17.157 6.117,15.665 7.341,15.665 7.925,15.665 ; 7.925,15.665 11.735,15.665 13.03,16.961 13.03,19.577 13.589,20.136 ; 13.589,20.136 14.427,20.974 16.713,20.974 ; 13.589,20.136 15.596,20.136 15.838,19.894 ; 15.838,19.894 16.713,20.974 ; H1.4 17.911,62.465 17.694,62.249 C12.1 17.694,58.88 20.676,55.899 ; 20.676,55.899 18.856,55.899 17.044,54.086 17.044,43.474 16.612,43.042 R8.2 15.838,42.068 18.009,39.897 22.835,39.897
pads on no net: U1.1 U1.2 U1.3 U1.4 U1.5 U1.7 U1.8 U1.9 U1.15 U1.16 U1.17 U1.18 U1.21 U1.33 U1.34 U1.37 U1.38 U1.39 U1.40 U1.41 U1.42 U1.43 U1.44 U1.45 U1.46 U1.47 U1.51 U1.52 U1.53 U1.54 U1.55 U1.56 U1.63 U1.64 U1.65 U1.66 U1.78 U1.79 U1.80 U1.81 U1.82 U1.83 U1.84 U1.85 U1.86 U1.87 U1.88 U1.89 U1.90 U1.91 U1.92 U1.93 U1.95 U1.96 U1.97 U1.98

## Polygon pours and split planes (outlines as drawn)
GND on Bottom Layer "GND_L02_P001" (solid, pour order 1): 0,82.042 55.372,82.042 55.372,0 0,0
GND on Top Layer "GND_L01_P000" (solid, pour order 0): 0,82.042 55.372,82.042 55.372,0 0,0

## Keep-outs
Keep-Out Layer:
  the board outline again, w0.254

## Text inside footprints (layer, text, board x,y; h text height)
U1: Top Overlay "100" at 37.303,31.31 h0.61 r270; Top Overlay "76" at 37.544,18.794 h0.61 r270; Top Overlay "75" at 36.541,17.797 h0.61 r270; Top Overlay "51" at 23.276,17.785 h0.61 r270; Top Overlay "50" at 22.287,18.796 h0.61 r270; Top Overlay "26" at 22.284,32.303 h0.61 r270; Top Overlay "25" at 23.283,33.055 h0.61 r270